# Altium PCB CH340C9R-R1.PcbDoc
Units mil, origin at the board's own origin, x right, y up, seen from the top; angles counter-clockwise.
Board outline 1567.27 x 575.04 mil, 2 copper layers (Top Layer, Bottom Layer); 18 components, 30 nets, 89 pads, 100 vias.
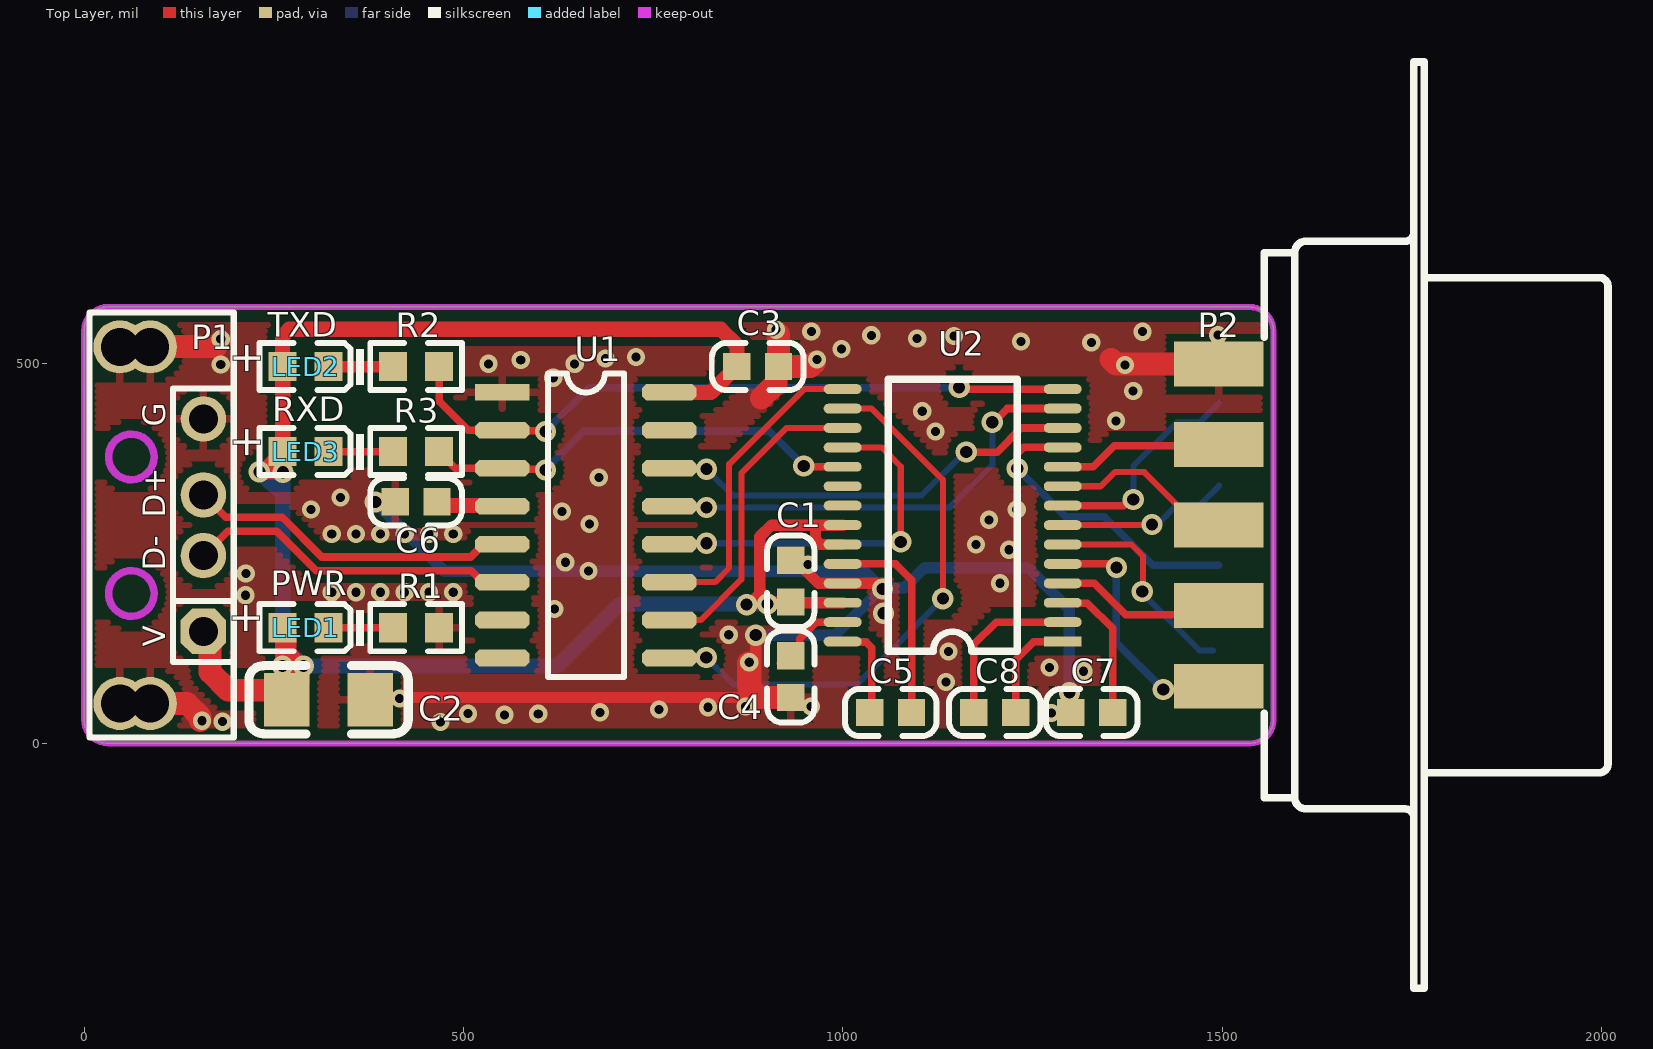
[diagram p0: Top Layer view]
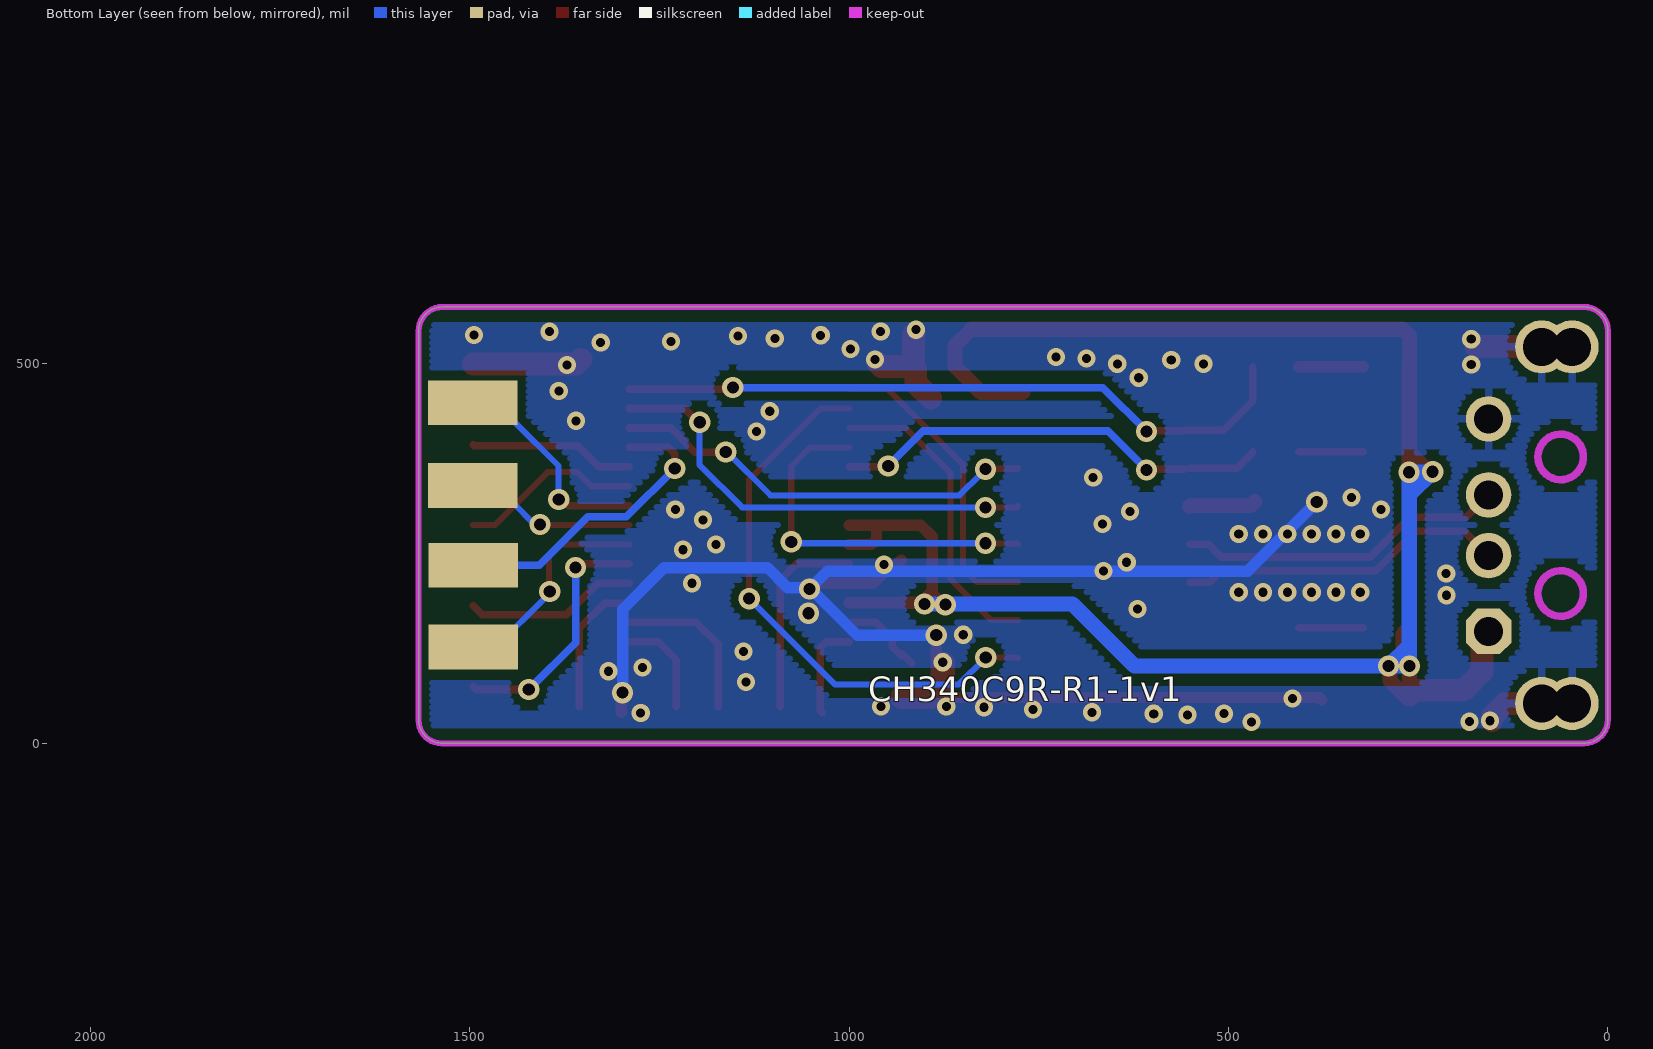
[diagram p1: Bottom Layer view, seen from below]

## Layer stack, top to bottom
Top Solder: solder mask 0.4, Solder Resist, Dk 3.5
Top Layer: signal copper 1.4
Dielectric 1: dielectric 12.6, FR-4, Dk 4.8
Bottom Layer: signal copper 1.4
Bottom Solder: solder mask 0.4, Solder Resist, Dk 3.5

## Board outline
0,31.5 0,543.54 cw(c31.5,543.54) 31.5,575.04 1535.78,575.04 cw(c1535.78,543.54) 1567.27,543.54 1567.27,31.5 cw(c1535.78,31.5) 1535.78,0 31.5,0 cw(c31.5,31.5)

## Design rules (kind name [scope] priority, off if disabled: settings)
Clearance Clearance_1 [InPolygon] p1: gap=10 ignorepadtopadclearanceinfootprint=FALSE
Clearance [All] p2: gap=8 ignorepadtopadclearanceinfootprint=FALSE
ComponentClearance [All] p1 off: gap=10 collisioncheckmode=3 verticalgap=10 showdistances=FALSE
MinimumSolderMaskSliver [All] p1 off: minsoldermaskwidth=10
PolygonConnect PolygonConnect_1 [IsVia] p1: connectstyle=Direct reliefconductorwidth=10 reliefentries=4 polygonreliefangle="90 Angle" airgapwidth=10
PolygonConnect [All] p2: connectstyle=Relief reliefconductorwidth=10 reliefentries=4 polygonreliefangle="90 Angle" airgapwidth=10
RoutingTopology RoutingTopology_1 [All] p1: topology=Shortest
RoutingTopology [All] p2: topology=Shortest
RoutingVias [All] p1: holewidth=28 width=50 viastyle="Through Hole" minholewidth=12 minwidth=24 maxholewidth=16 maxwidth=28
SilkToSilkClearance [All] p1 off: silktosilkclearance=10
SilkToSolderMaskClearance [IsPad] p1 off: minsilkscreentomaskgap=10 clearancetoexposedcopper=TRUE
SolderMaskExpansion [All] p1: expansion=4 istentingtop=FALSE
Width [All] p1: maxlimit=60 minlimit=8 preferedwidth=10
25 further rules are at their usual default settings.

## Components (designator, comment, footprint, x,y, rotation, side; value= is the part's Value field where it differs from the comment)
C1 "0.1uF" 0603_C 931.33,186.21 r90 top
C2 "10uF" 3216_C 267.27,57.43 r180 top
C3 "0.1uF" 0603_C 860.12,496.43 r0 top
C4 "0.1uF" 0603_C 931.33,115.39 r270 top
C5 "0.1uF" 0603_C 1035.48,40.56 r0 top
C6 "0.1uF" 0603_C 410.1,318.43 r0 top
C7 "0.1uF" 0603_C 1355.46,40.56 r180 top
C8 "0.1uF" 0603_C 1227.62,40.56 r180 top
LED1 "PWR" 0603+ 261.64,152.43 r0 top
LED2 "TXD" 0603+ 261.64,496.43 r0 top
LED3 "RXD" 0603+ 261.64,384.43 r0 top
P1 "USB" USBAM 157.27,147.43 r90 top
P2 "DB9" DB9-PAD-M 1495.01,75.12 r180 top
R1 "2K" 0603 407.27,152.43 r0 top
R2 "2K" 0603 407.27,496.43 r0 top
R3 "2K" 0603 407.27,384.43 r0 top
U1 "CH340C" SOP16 551.27,462.43 r270 top
U2 "MAX3243" SSOP28 1289.68,134.05 r180 top

## Footprints (in the part's own frame and the unit in brackets; to place one, negate y for a bottom-side part, rotate by r counter-clockwise, add the part's x,y. Pads: shape width x height; smd on the part's side, far side on the other; paste and mask are expansions set on the pad)
0603 [mm]
  rect 0.93x0.98 smd: 1(0,0) 2(1.54,0)
  silkscreen extent -0.76,-0.79 2.3,0.79
0603+ [mm]
  rect 0.93x0.98 smd: 1(0,0) 2(1.54,0)
  silkscreen extent -0.76,-0.79 2.72,0.79
0603_C [mil]
  rect 36x36 smd: 1(0,0) 2(55,0)
  silkscreen extent -33,-31 88,31
3216_C [mil]
  rect 60x70 smd: 1(0,0) 2(-110,0)
  silkscreen extent -160,-45 50,45
DB9-PAD-M [mm]
  rect 3x1.5 smd: 1(-0.01,-0.005) 2(-0.01,-2.7) 3(-0.01,-5.395) 4(-0.01,-8.09) 5(-0.01,-10.785)
  rect 3x1.5 smd far side: 6(-0.002,-1.315) 7(-0.012,-4.05) 8(-0.02,-6.717) 9(-0.02,-9.493)
  silkscreen extent -13.03,-20.89 -1.53,10.11
SOP16 [mil]
  rect 22x72 smd: 1(0,0)
  oct 22x72 smd: 2(50,0) 3(100,0) 4(150,0) 5(200,0) 6(250,0) 7(300,0) 8(350,0) 9(350,220) 10(300,220) 11(250,220) 12(200,220) 13(150,220) 14(100,220) 15(50,220) 16(0,220)
  silkscreen extent -25,60 375,160
SSOP28 [mil]
  rect 50x13 smd: 1(0,0)
  oval 50x13 smd: 2(0,-25.59) 3(0,-51.18) 4(0,-76.77) 5(0,-102.36) 6(0,-127.95) 7(0,-153.55) 8(0,-179.14) 9(0,-204.73) 10(0,-230.32) 11(0,-255.91) 12(0,-281.5) 13(0,-307.09) 14(0,-332.68) 15(290,-332.68) 16(290,-307.09) 17(290,-281.5) 18(290,-255.91) 19(290,-230.32) 20(290,-204.73) 21(290,-179.14) 22(290,-153.55) 23(290,-127.95) 24(290,-102.36) 25(290,-76.77) 26(290,-51.18) 27(290,-25.59) 28(290,0)
  silkscreen extent 60,-345 230,13
USBAM [mil]
  oct 60x60 hole 38: 1(0,0)
  round 60 hole 38: 2(100,0) 3(180,0) 4(280,0)
  round 70 hole 50: 5(-95,70) 5(-95,110) 6(375,70) 6(375,110)
  Keep-Out Layer circle w10: c230,95 r30
  Keep-Out Layer circle w10: c50,95 r30
  silkscreen extent -140,-40 420,150

## Part data
C1 C4 C5 C7 C8: library part CAP
C2 C3 C6: library part CAP, "Capacitor"
LED1 LED2 LED3: library part LED2, "Typical RED, GREEN, YELLOW, AMBER GaAs LED"
R1 R2 R3: library part Res2, "Resistor"
U1: "USB to TTL Serial / UART"

## Via types
v1: diameter 24, hole 12, Top Layer to Bottom Layer, 71 vias
v2: diameter 28, hole 16, Top Layer to Bottom Layer, 29 vias

## Nets (pads, with @x,y where several pads share a name; then routed paths per layer and width w, separated by ;. In a path a pad name is that pad's centre, name@x,y a point inside that pad or via, vN(x,y) a via of type N, cw(c..) or ccw(c..) an arc to the next point about the centre after c; other vN are vias at no path point)
CTS: U1.9 U2.16 | length 743.7
  Top Layer w8: U1.9@777.27,112.43 777.85,113 v2(820,113) ; U2.16 1037.9,441.15 1131.69,347.36 v2(1131.69,190.62)
  Bottom Layer w8: v2(820,113) 855.36,77.64 1018.71,77.64 v2(1131.69,190.62)
DCD: U1.12 U2.18 | length 486.5
  Top Layer w8: U1.12@777.27,262.43 777.88,263.04 824.59,263.04 v2@825.19,263.64 ; U2.18 1051.07,389.96 1076.24,364.79 v2(1076.24,265.45)
  Bottom Layer w8: v2@825.19,263.64 1074.44,263.64 v2(1076.24,265.45)
  other v2: 820.19,263.64
DSR: U1.10 U2.17 | length 409.2
  Top Layer w8: U1.10@777.27,162.43 812.47,162.43 866.1,216.06 866.1,355.91 925.75,415.56 U2.17
DTR: U1.13 U2.13 | length 600.1
  Top Layer w8: U1.13@777.27,312.43 778.9,310.8 v2@830.95,310.8
  Top Layer w10: v2(1196.9,423.1) 1198.77,423.1 1216.82,441.15 U2.13
  Bottom Layer w8: v2@830.95,310.8 1141.04,310.8 1196.9,366.66 v2(1196.9,423.1)
  other v2: 820.19,310.8
GND: C1.2 C2.2 C3.2 C4.2 C6.1 C7.2 P1.4 P1.5 P1.6 P2.5 R1.2 U1.1 U2.25 | length 2678.2
  Top Layer w15: C2.2 380.23,60.39 890.43,60.39 901.08,60.39 885.24,76.23 v2(885.24,142.55) ; C1.2 941.83,230.71 948.04,230.71 968.02,210.73 999.59,210.73 U2.25 v2@1041.23,210.83 ; v2(1298.47,66.72) 1300.22,66.72 1300.22,40.8 C7.2
  Top Layer w30: P1.5@47.27,52.43 87.27,52.43 135.55,52.43 153.12,34.86 v1@153.12,30.11 ; P1.6@47.27,522.43 47.64,522.8 v1@174.12,522.8 ; v1@875.53,105.94 875.53,75.28 890.43,60.39 ; 892.53,454.98 912.12,474.56 912.12,493.43 C3.2 ; 901.08,60.39 C4.2 ; v1@914.18,539.87 915.12,538.94 C3.2 ; v1@962.76,501.72 957.47,496.43 C3.2 ; 1353.29,506.12 1359.69,499.72 P2.5
  Bottom Layer w15: v2(383.7,317.95) 474.73,226.92 1028.66,226.92 1050.41,205.17 v2@1050.41,203.46 ; v2(885.24,142.55) 989.49,142.55 v2@1050.41,203.46 ; v2(1298.47,66.72) 1298.47,176.52 1243.49,231.5 1107.59,231.5 1081.12,205.03 1053.68,205.03 v2(1052.12,203.46) v2@1050.41,203.46
  other v1: 182.56,28.54 469.56,28.19 155.52,29.68 554.13,37.54 598.53,38.84 505.78,39.03 1274.69,39.77 679.86,40.8 757.76,44.63 822.3,47.46 871.9,48.67 957.94,48.44 415.68,59.14 1136.03,80.79 1317.15,94.89 1272.34,100.01 876.64,106.78 1139.29,121.03 849.54,143.09 619.87,176.91 212.89,195.14 326.4,199.07 358.44,199.07 390.47,199.07 422.51,199.07 454.54,199.07 486.58,199.07 1206.88,210.87 213.23,223.67 664.75,227 953.91,235.39 634.26,238.61 1218.98,255.05 1175.32,261.89 326.4,275.72 358.44,275.72 390.47,275.72 422.51,275.72 454.54,275.72 486.58,275.72 665.99,288.95 1192.68,294.5 629.87,305.47 299.16,308 1228.98,308.18 338.08,323.91 678.4,350.34 1121.99,410.99 1359.96,424.98 1104.56,437.56 1382.5,464.27 618.3,481.68 1371.81,498.57 180.2,499.24 533.04,500.06 646.57,500.06 575.44,505.24 965.89,505.86 687.19,507.07 727.32,508.98 998.26,519.55 1327.4,528 1234.84,529.6 180.2,532.58 1097.88,533.35 1146.57,536.56 1037.49,537.61 1494.33,538.16 958.41,542.59 1394.81,542.44 911.72,545.08
  other v2: 1053.43,171.34
NetC4_1: C4.1 U2.27 | length 110
  Top Layer w10: C4.1@917.33,105.39 C4.1@929.33,117.39 ; C4.1 942.9,126.96 942.9,137.86 964.68,159.65 U2.27
NetC5_1: C5.1 U2.28 | length 128.4
  Top Layer w10: U2.28 1000.26,133.48 1030.75,133.48 1038.2,126.03 1038.2,43.28 C5.1
NetC5_2: C5.2 U2.24 | length 266.2
  Top Layer w10: U2.24 1069.26,236.42 1090.48,215.19 C5.2@1090.48,48.56
NetC7_1: C7.1 U2.3 | length 182.6
  Top Layer w10: U2.3 1290.26,184.66 1322.15,184.66 1355.46,151.35 C7.1@1355.46,48.56
NetC8_1: C8.1 U2.1 | length 133.5
  Top Layer w10: C8.1@1227.62,48.56 1227.62,109.98 1251.69,134.05 U2.1
NetC8_2: C8.2 U2.2 | length 211
  Top Layer w10: C8.2@1172.62,48.56 1172.62,130.3 1201.96,159.65 U2.2
NetLED1_2: LED1.2 R1.1 | length 85
  Top Layer w10: LED1.2 R1.1
NetLED2_2: LED2.2 R2.1 | length 85
  Top Layer w15: LED2.2 R2.1
NetLED3_2: LED3.2 R3.1 | length 85
  Top Layer w10: LED3.2 R3.1
RI: U1.11 U2.15 | length 407.9
  Top Layer w8: U1.11@777.27,212.43 831.54,212.43 850.1,231 850.1,367.86 948.98,466.74 U2.15
RS232_CTS: P2.8 U2.7 | length 227.6
  Top Layer w8: U2.7 1406.69,287.6 v2(1407.48,288.39)
  Bottom Layer w8: v2(1407.48,288.39) 1411.3,292.21 1418.29,292.21 1440.14,314.06 1470.27,314.06 P2.8
RS232_DCD: P2.1 U2.5 | length 345.7
  Top Layer w10: U2.5 v2@1350.84,236.42 ; v2(1422.06,70.91) 1491,70.91 P2.1 ; v2@1350.84,236.42 1355.71,236.42 v2(1360.44,231.69) 1355.57,231.69 v2@1350.84,236.42
  Bottom Layer w10: v2(1360.44,231.69) 1360.44,132.53 v2(1422.06,70.91)
RS232_DSR: P2.6 U2.6 | length 277.4
  Top Layer w8: U2.6 1380.11,262.01 1395.25,246.88 v2@1395.25,207.96
  Bottom Layer w8: v2(1394.51,199.89) 1394.51,197.96 1469.93,122.54 P2.6@1487.95,122.54
RS232_DTR: P2.4 U2.10 | length 217.8
  Top Layer w10: U2.10 1330.02,364.37 1357.53,391.88 1493.66,391.88 P2.4
RS232_RI: P2.9 U2.8 | length 288.2
  Top Layer w10: U2.8 1369.74,313.19 1377.82,321.26 v2(1382.69,321.26)
  Bottom Layer w8: v2(1382.69,321.26) 1382.69,365.46 1440.54,423.31 1470.27,423.31 P2.9
RS232_RTS: P2.7 U2.11 | length 401.4
  Top Layer w10: v2(1229.75,362.12) 1229.75,381.43 1238.29,389.96 U2.11
  Bottom Layer w10: v2(1229.75,362.12) 1293.53,298.35 1344.47,298.35 1408.25,234.57 P2.7
RS232_RXD: P2.2 U2.4 | length 227.8
  Top Layer w10: U2.4 1331.32,210.83 1372.63,169.51 1483.5,169.51 P2.2
RS232_TXD: P2.3 U2.9 | length 242.4
  Top Layer w8: U2.9 1339.64,338.78 1358.31,357.45 1397.06,357.45 1466.99,287.52 P2.3
RTS: U1.14 U2.12 | length 567.3
  Top Layer w8: U1.14@777.27,362.43 777.86,361.85 825.43,361.85 v2@826.02,361.26
  Top Layer w10: v2(1162.64,383.82) 1203.53,383.82 1235.27,415.56 U2.12
  Bottom Layer w8: v2@826.02,361.26 826.02,355.44 854.65,326.8 1103.58,326.8 1160.6,383.82 v2(1162.64,383.82)
  other v2: 820.19,361.26
RXD: R3.2 U1.3 U2.19 | length 575.6
  Top Layer w10: R3.2 467.9,383.45 488.92,362.43 U1.3 ; U1.3@558.34,361.36 607.02,361.36 v2(608.09,360.29) ; v2(948.36,365.48) 949.47,364.37 U2.19
  Bottom Layer w10: v2(608.09,360.29) 659.38,411.59 902.25,411.59 v2(948.36,365.48)
TXD: R2.2 U1.2 U2.14 | length 908.7
  Top Layer w10: R2.2 467.9,450.63 506.11,412.43 U1.2 557.27,412.43 557.96,411.74 607.25,411.74 v2(607.94,411.06) ; v2(1153.19,468.73) 1155.18,466.74 U2.14
  Bottom Layer w10: v2(607.94,411.06) 665.61,468.73 v2(1153.19,468.73)
UD+: P1.3 U1.5 | length 434.9
  Top Layer w10: P1.3 186.74,297.97 260.94,297.97 313.39,245.51 509.36,245.51 526.27,262.43 U1.5
UD-: P1.2 U1.6 | length 434.9
  Top Layer w10: P1.2 189.2,279.35 254.1,279.35 306.32,227.13 510.33,227.13 525.04,212.43 U1.6
V3: C6.2 U1.4 | length 88.7
  Top Layer w20: C6.2 470.1,313.43 550.27,313.43 U1.4
VCC: C1.1 C2.1 C3.1 LED1.1 LED2.1 LED3.1 P1.1 U1.16 U2.22 U2.23 U2.26 | length 2927
  Top Layer w15: 890.35,196.7 v2@878.13,184.48 ; v2@892.96,193.5 900.25,186.21 C1.1 ; v2(900.79,183.58) v2@899.89,184.48 ; v2@902.85,188.27 899.62,188.27 898.3,189.58 898.3,192.81 890.4,200.72 ; U2.26 999.53,185.39 932.16,185.39 C1.1 ; U2.23 970.55,262.01 963.96,268.6 963.96,287.6 ; U2.22 963.96,287.6 ; v2@878.13,184.48 v2@899.89,184.48 ; v2@878.13,184.48 874.93,184.48 v2(873.19,182.74) 876.39,182.74 v2@878.13,184.48 ; 890.4,200.72 890.4,272.13 905.87,287.6 963.96,287.6 ; 890.4,200.72 890.4,193.97 v2@899.89,184.48 ; v2@899.89,184.48 929.6,184.48 C1.1
  Top Layer w20: v2(261.51,101.97) v2@261.62,101.86 ; LED3.1 261.64,383.45 237.64,359.44 232.58,359.44 v2(231.05,357.91) 231.4,357.56 261.91,357.56 v2@261.95,357.51 ; v2(262.26,357.21) v2@261.95,357.51 ; U1.16 826.12,462.43 C3.1 860.46,496.78 860.46,524.17 838.97,545.67 270.43,545.67 261.64,536.88 LED2.1 261.95,496.12 261.95,383.45 v2@261.95,357.51 ; v2@261.64,101.86 v2@286.92,101.86 ; v2@261.64,101.86 v2@261.64,115.05 ; v2@261.64,101.86 261.64,63.33 261.51,63.19 268.04,63.19 287.27,82.43 287.27,97.67 289.19,99.59 v2(289.19,101.75) ; v2@261.64,115.05 LED1.1 269.95,144.12 269.95,118.83 273.73,115.05 ; v2@261.64,115.05 273.73,115.05 ; 273.73,115.05 v2@286.92,101.86 ; v2@286.92,101.86 289.08,101.86 v2(289.19,101.75) ; v2@286.92,101.86 287.03,101.75 v2(289.19,101.75)
  Top Layer w30: P1.1 166.06,138.64 166.06,93.89 190,69.96 254.75,69.96 C2.1@261.51,63.19
  Bottom Layer w20: v2(231.05,357.91) v2@231.4,357.56 ; v2(289.19,101.75) v2@288.97,101.97 ; v2(900.79,183.58) 705.52,183.58 623.92,101.97 v2@288.97,101.97 ; v2@231.4,357.56 261.88,327.08 ; v2@231.4,357.56 261.91,357.56 v2(262.26,357.21) 261.88,356.83 261.88,327.08 ; 261.88,129.06 261.88,327.08 ; 261.88,129.06 v2@288.97,101.97 ; 261.88,129.06 261.88,102.35 v2(261.51,101.97) v2@288.97,101.97
pads on no net: U1.7 U1.8 U1.15 U2.20 U2.21

## Polygon pours and split planes (outlines as drawn)
GND on Bottom Layer "GND_L01_P-001" (hatched Horizontal grid 8 track 8, remove dead copper, pour order 1): -3.04,575.8 -3.04,-2.55 1574.32,-2.55 1574.32,580.52
GND on Top Layer "GND_L01_P-001" (hatched Horizontal grid 8 track 8, remove dead copper, pour order 0): -3.04,575.8 -3.04,-2.55 1574.32,-2.55 1574.32,580.52

## Keep-outs
Keep-Out Layer:
  lines w8: 1567.24,29.93 ccw(c1567.24,29.96) 1567.27,29.96 1567.27,543.54 ccw(c1535.78,543.54) 1535.78,575.04 31.5,575.04 ccw(c31.5,543.54) 0,543.54 0,31.5 ccw(c31.5,31.5) 31.5,0 1537.31,0 ccw(c1537.31,29.93) 1567.24,29.93 ; 1567.24,29.93 ccw(c1567.24,29.93) 1567.24,29.93 ; 1567.24,29.93 1567.24,29.93

## Silkscreen, mask and mechanical layers (free items; w line width, h text height)
Bottom Overlay:
  text "CH340C9R-R1-1v1" at 975.09,55.27 h32
Mechanical 1:
  the board outline again, w8

## Text inside footprints (layer, text, board x,y; h text height)
LED1: Top Overlay "+" at 230.85,141.7 h40 r90
LED2: Top Overlay "+" at 232.4,484.56 h40 r90
LED3: Top Overlay "+" at 232.01,373.77 h40 r90
P1: Top Overlay "G" at 107.27,417.43 h30 r90; Top Overlay "V" at 107.27,127.43 h30 r90; Top Overlay "D+" at 107.27,297.43 h30 r90; Top Overlay "D-" at 107.27,227.43 h30 r90